# Altium PCB cahrgebot_digital.PcbDoc (part 2 of 2)
Units mm, origin at the board's own origin, x right, y up, seen from the top; angles counter-clockwise.
Board outline 99.66 x 99.5 mm, 4 copper layers (Top Layer, GND, POWER, Bottom Layer), stack 1.591 mm thick; 129 components, 91 nets, 432 pads, 108 vias.
Unrouted connection lines stored in the file: 110.
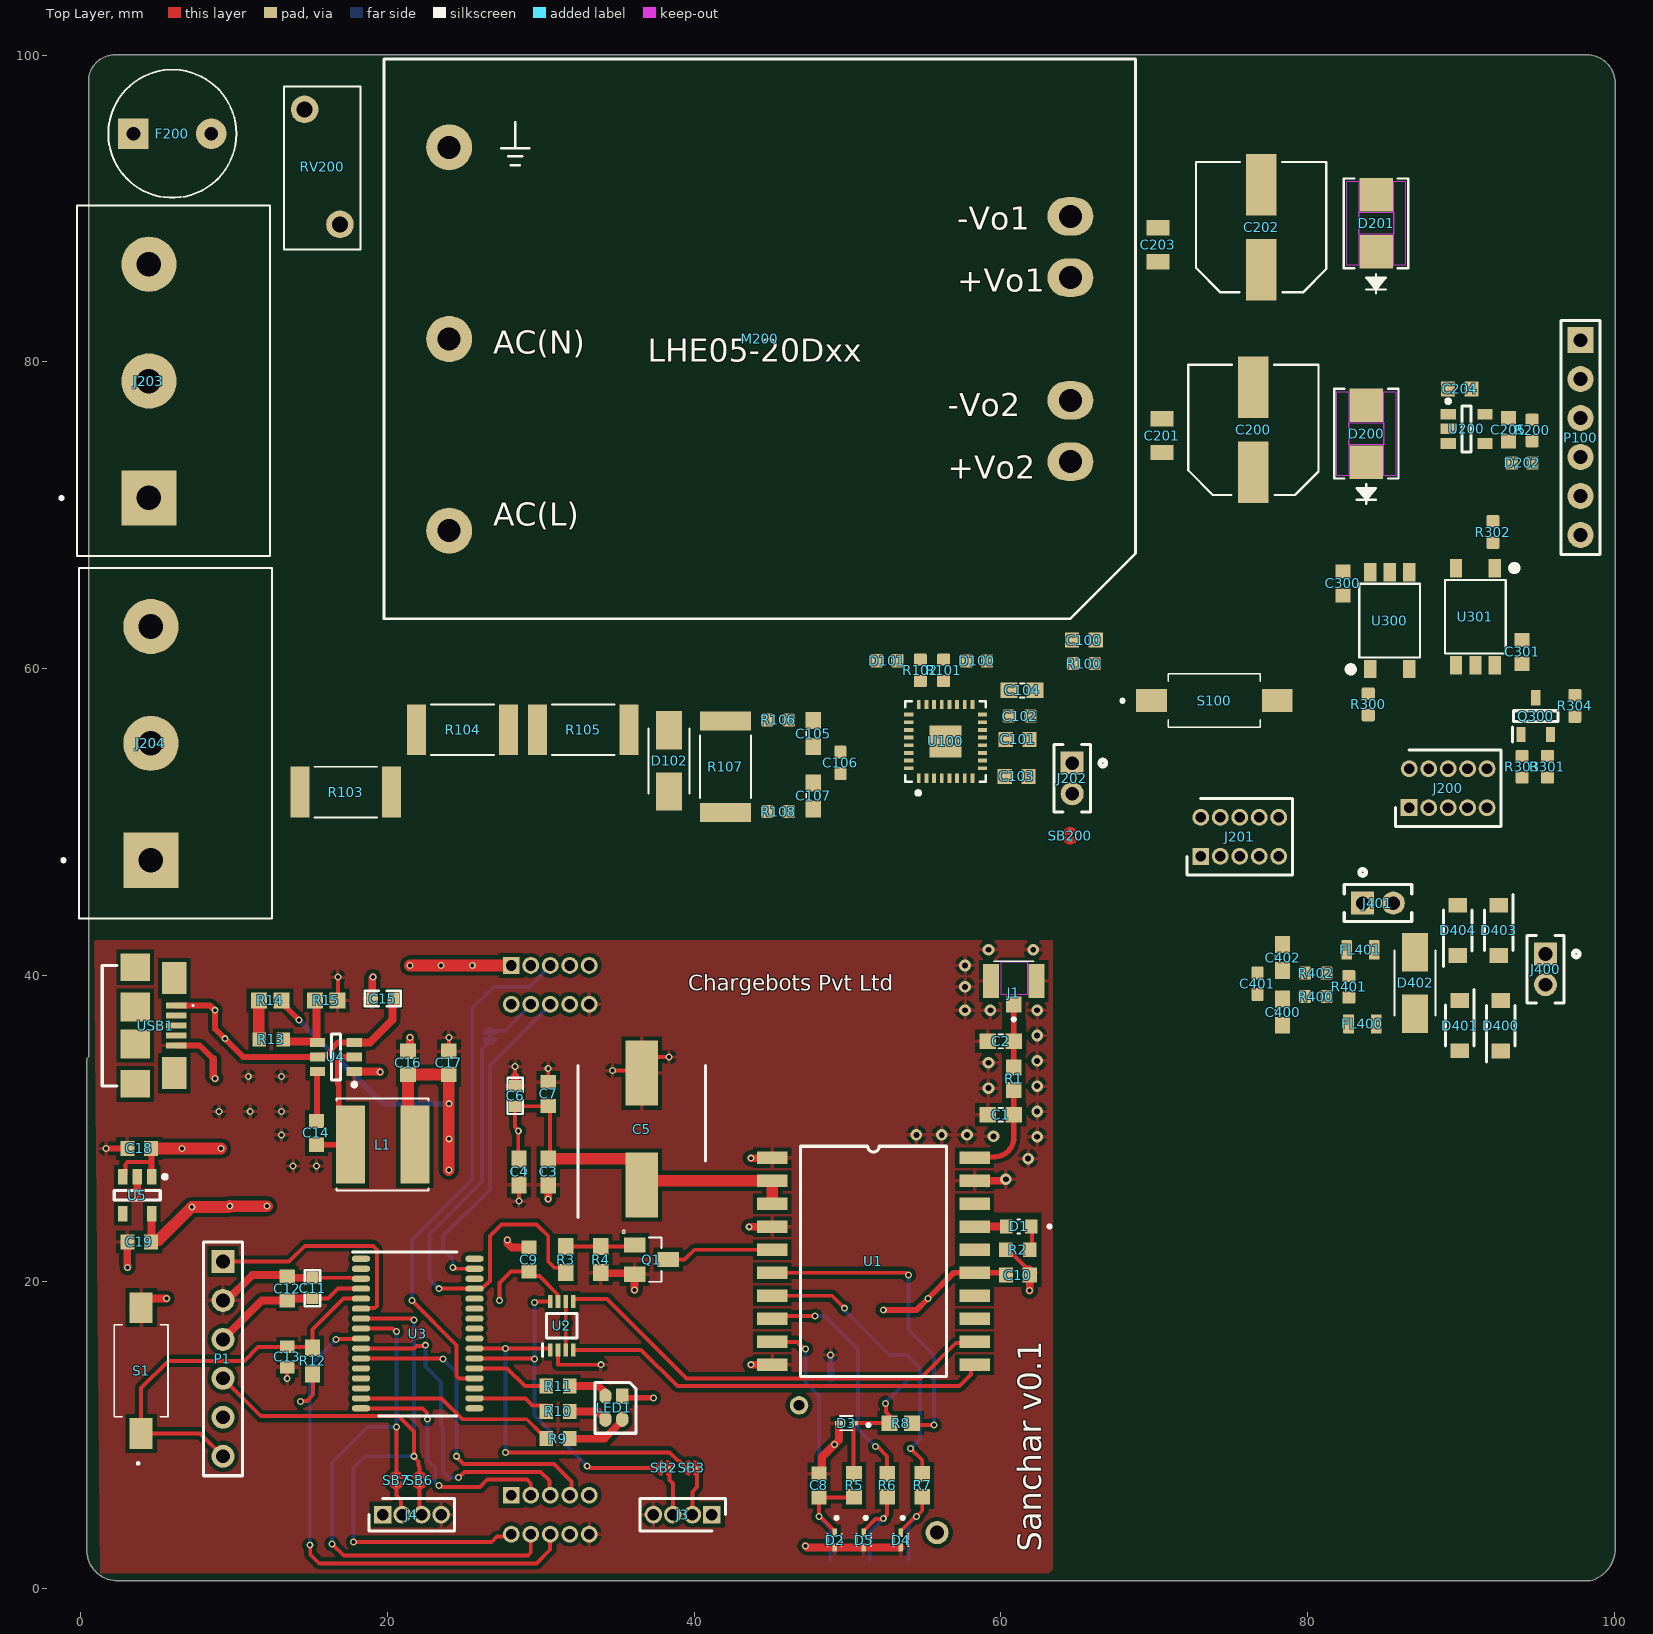
[diagram p0: Top Layer view]

## Via types
v1: diameter 0.457, hole 0.254, Top Layer to Bottom Layer, 88 vias
v2: diameter 0.762, hole 0.381, Top Layer to Bottom Layer, 20 vias

## Nets (pads, with @x,y where several pads share a name; then routed paths per layer and width w, separated by ;. In a path a pad name is that pad's centre, name@x,y a point inside that pad or via, vN(x,y) a via of type N, cw(c..) or ccw(c..) an arc to the next point about the centre after c; other vN are vias at no path point) (continued)
RST/SBWTDIO: (continued)
  Top Layer w0.254: P1.6 7.783,10.124 S1.1 3.937,13.081 5.715,14.859 10.668,14.859 11.557,15.748 15.074,15.748 R12.1 15.113,16.891 17.134,18.912 U3.5@18.144,18.912
SBWTCK: P1.1 U3.6 | length 15.5
  Top Layer w0.254: P1.1 13.589,21.336 14.605,22.352 19.05,22.352 19.304,22.098 19.304,18.439 19.155,18.29 18.172,18.29 U3.6@18.144,18.262
SIM_CLK: R7.1 U1.7 | length 19.2
  Top Layer w0.254: U1.7 48.974,19.098 v1(49.784,18.288) ; v1(54.102,9.144) 54.864,8.382 R7.1
  Bottom Layer w0.254: v1(49.784,18.288) 49.784,18.233 49.886,18.131 49.886,18.059 52.719,15.226 53.863,15.226 54.58,14.509 54.729,14.36 54.729,9.771 v1(54.102,9.144)
SIM_DATA: R8.1 U1.6 | length 21.4
  Top Layer w0.254: U1.6@44.485,20.598 U1.6 53.824,20.598 v1(53.975,20.447) ; R8.1@54.462,10.922 54.462,10.801 54.595,10.668 v1(55.626,10.668)
  Bottom Layer w0.254: v1(53.975,20.447) 53.975,16.864 55.626,15.213 v1(55.626,10.668)
SIM_RESET: R6.1 U1.8 | length 15.6
  Top Layer w0.254: U1.8 45.267,17.78 v1(47.879,17.78) ; v1(51.816,9.271) 51.943,9.271 52.578,8.636 R6.1 ; R6.1@52.578,7.439 R6.1@52.578,7.449
  Bottom Layer w0.254: v1(47.879,17.78) 48.514,17.78 50.673,15.621 50.673,10.414 v1(51.816,9.271)
TEST_AFE_RX: J4.2 SB7.1 | length 2.1
  Top Layer w0.254: SB7.1 20.574,6.09 20.882,5.782 20.882,4.899 J4.2
TEST_AFE_TX: J4.3 SB6.2 | length 2
  Top Layer w0.254: SB6.2 22.098,4.953 J4.3 J4.3@22.225,4.744
U_RX: U1.11 U2.4 | length 28
  Top Layer w0.254: U2.4 36.539,15.57 38.901,13.208 57.296,13.208 58.054,13.966 58.054,14.367 U1.11
U_TX: U1.12 U2.5 | length 29.3
  Top Layer w0.254: U2.5@32.131,18.909 32.142,18.898 34.315,18.898 39.497,13.716 54.761,13.716 57.053,16.007 58.194,16.007 U1.12
UC_SCL: U3.14
UC_SDA: U3.13
V+: C105.1 C106.2 R106.2 U100.1
V-: C106.1 C107.2 R108.2 U100.2
VSIM: C8.2 D2.C J2.C1 R5.2 U1.9 | length 21.8
  Top Layer w0.254: U1.9 46.712,16.098 47.189,15.621 v1(47.244,15.621) ; D2.C 49.149,3.775 48.264,4.66 48.172,4.66 v1(48.133,4.699) C8.2 50.379,5.956 R5.2
  Bottom Layer w0.254: v1(47.244,15.621) 47.244,13.462 48.133,12.573 v1(48.133,4.699) 48.895,3.937 J2.C1
pads on no net: F200.1 J2.1 J2.2 J2.6 J2.10 J2.C6 J5.8 J5.9 J6.2 J6.3 J6.7 J6.8 J6.9 J200.8 J200.9 J201.2 J201.3 J201.4 J201.7 J201.8 J201.9 M200.4 P100.4 P100.5 U1.13 U1.14 U1.16 U1.18 U3.1 U3.2 U3.12 U3.17 U3.19 U3.24 U3.25 U3.26 U3.27 U3.28 U3.30 U3.32 U5.4 U100.7 U100.8 U100.11 U100.23 U100.24 U100.25 U100.26 U100.27 U100.28 U100.29 U100.30 U100.31 U100.32 U200.4 USB1.2 USB1.3 USB1.4 USB1.MP1 USB1.MP2 USB1.MP3 USB1.MP4 USB1.MP5 USB1.MP6

## Polygon pours and split planes (outlines as drawn)
GND on Bottom Layer "GND_L04_P001" (solid, pour order 1): 0.89,42.291 63.374,42.291 63.374,1.27 63.12,1.016 1.271,1.016
GND on Top Layer "GND_L01_P000" (solid, pour order 0): 0.89,42.291 63.374,42.291 63.374,1.27 63.12,1.016 1.271,1.016
+5 on POWER (split plane): 29.462,36.959 19.812,36.959 19.746,36.95 19.702,36.932 19.684,36.925 19.631,36.884 9.673,26.926 1.122,26.926 0.943,27.105 0.891,27.157 0.891,34.337 0.932,34.387 0.98,34.476 1.009,34.571 1.018,34.671 1.018,41.654 29.462,41.654
+4 on POWER (split plane): 193 vertices, not listed, extent 0.89,1.017 99.535,99.5
GND on GND (split plane): 98.346,99.493 98.494,99.468 98.638,99.426 98.777,99.369 98.909,99.296 99.031,99.209 99.143,99.109 99.243,98.997 99.33,98.874 99.403,98.743 99.46,98.604 99.502,98.46 99.527,98.312 99.535,98.175 99.533,98.162 99.533,2.612 99.535,2.599 99.527,2.45 99.504,2.289 99.464,2.131 99.409,1.978 99.34,1.831 99.256,1.691 99.159,1.56 99.05,1.44 98.929,1.33 98.798,1.233 98.659,1.15 98.512,1.08 98.358,1.025 98.347,1.022 62.103,1.022 62.071,1.019 62.071,1.021 61.991,1.017 61.976,1.018 2.413,1.018 2.398,1.017 2.242,1.026 2.074,1.054 1.91,1.102 1.752,1.167 1.602,1.25 1.463,1.349 1.335,1.462 1.222,1.59 1.123,1.729 1.04,1.879 0.975,2.037 0.927,2.201 0.899,2.369 0.89,2.525 0.891,2.54 0.891,34.337 0.932,34.387 0.98,34.476 1.009,34.571 1.018,34.671 1.018,98.298 1.017,98.31 1.024,98.433 1.047,98.566 1.084,98.695 1.136,98.82 1.201,98.938 1.279,99.048 1.369,99.149 1.47,99.239 1.58,99.317 1.698,99.382 1.822,99.433 1.952,99.471 2.085,99.493 2.208,99.5 2.22,99.499 98.196,99.499 98.209,99.5

## Keep-outs
Keep-Out Layer:
  region: 60.008,40.894 61.722,40.894 61.722,38.735 60.007,38.735

## Other copper
Top Layer:
  pour cut-out: 57.018,24.511 62.611,24.511 62.611,19.703 57.08,19.703 57.036,19.747
  pour cut-out: 18.923,14.732 25.019,14.732 25.019,11.684 19.05,11.684
  pour cut-out: 26.416,14.097 28.702,14.097 28.702,12.573 26.416,12.573
  pour cut-out: 31.037,13.952 31.037,12.69 31.199,12.69 31.199,13.952
  pour cut-out: 29.294,12.82 29.424,12.69 33.424,12.69 33.424,11.834 33.401,11.811 33.037,12.175 29.227,12.175
  pour cut-out: 60.087,35.009 61.615,35.009 61.615,34.764 61.62,34.759 60.047,34.759 60.047,34.969
  pour cut-out: 60.079,37.338 61.587,37.338 61.637,36.441 60.079,36.491
  pour cut-out: 18.856,5.655 18.912,5.599 23.175,5.599 23.175,3.876 23.054,3.997 18.856,3.997
Bottom Layer:
  pour cut-out: 22.86,15.24 22.879,15.259 23.213,15.259 23.213,11.021 22.733,10.541 24.384,10.541 24.384,14.605 23.749,15.24
POWER (plane layer: these items are gaps in the copper):
  lines w0.508: 0.381,41.91 29.718,41.91 29.718,36.703 19.812,36.703 9.779,26.67 ; 0.508,41.91 0.508,27.178 0.762,26.924 1.016,26.67 9.779,26.67 ; 28.321,36.703 29.464,36.703 ; 31.115,19.685 29.337,19.685 28.321,20.701 25.019,24.003 19.431,24.003 16.383,24.003 13.716,26.67 10.668,26.67 9.779,26.67 ; 63.246,19.812 57.912,19.812 54.61,16.51 29.083,16.51 28.575,17.018 28.575,19.05 29.083,19.558 54.229,19.558 55.88,21.209 58.928,21.209 63.246,21.209

## Silkscreen, mask and mechanical layers (free items; w line width, h text height)
Top Overlay:
  text "Chargebots Pvt Ltd" at 39.624,38.989 h1.02
  text "Sanchar v0.1" at 62.611,2.413 h1.52 r90
board shape:
  lines w0.254: 0,2.54 0.508,98.171 cw(c2.337,98.171) 2.337,100 2.554,100 ; 0.381,2.54 ccw(c2.413,2.54) 2.413,0.508 97.913,0.453 ccw(c97.913,2.54) 100,2.54 100.036,98.19 ccw(c98.277,98.19) 98.277,99.949 2.413,100

## Text inside footprints (layer, text, board x,y; h text height)
M200: Top Overlay "-Vo2" at 56.515,76.432 h1.5; Top Overlay "+Vo1" at 57.158,84.557 h1.5; Top Overlay "LHE05-20Dxx" at 36.957,80.01 h1.5; Top Overlay "AC(N)" at 26.906,80.522 h1.5; Top Overlay "AC(L)" at 26.906,69.307 h1.5; Top Overlay "+Vo2" at 56.515,72.37 h1.5; Top Overlay "-Vo1" at 57.158,88.619 h1.5
U300: Top Component Outline "*" at 84.521,61.113 h0.64 r90
U301: Top Component Outline "*" at 91.755,65.379 h0.64 r270